# Altium PCB PCB.PcbDoc
Units mm, origin at the board's own origin, x right, y up, seen from the top; angles counter-clockwise.
Board outline 321.18 x 319.79 mm, 2 copper layers (Top Layer, Bottom Layer); 160 components, 123 nets, 699 pads, 0 vias.
Unrouted connection lines stored in the file: 384.
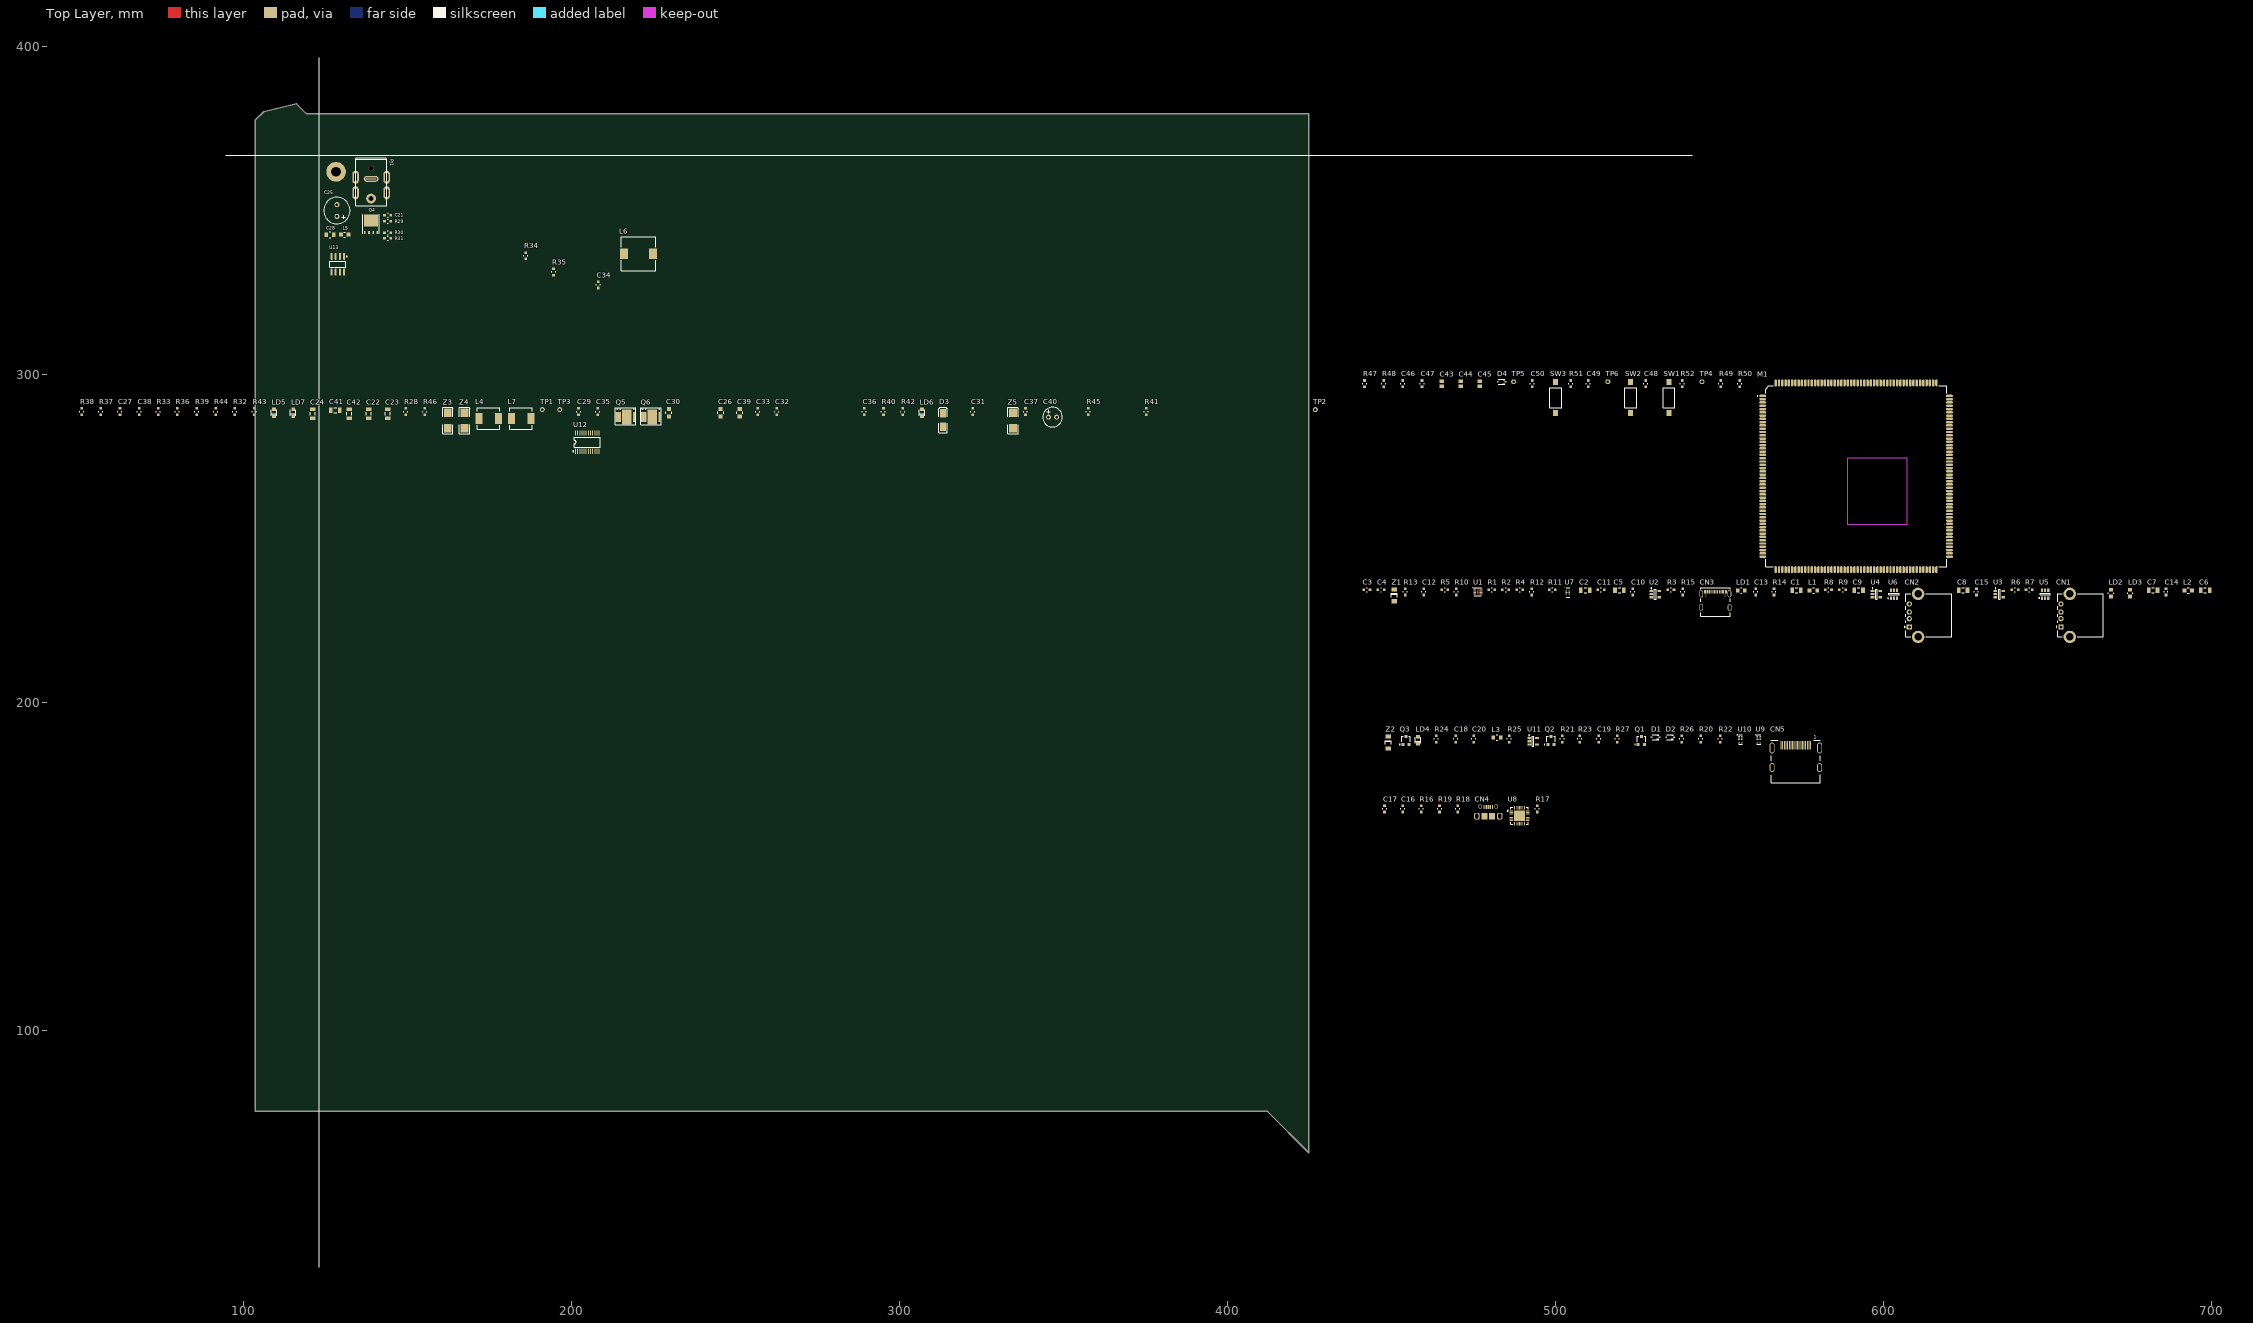
[diagram p0: Top Layer view]
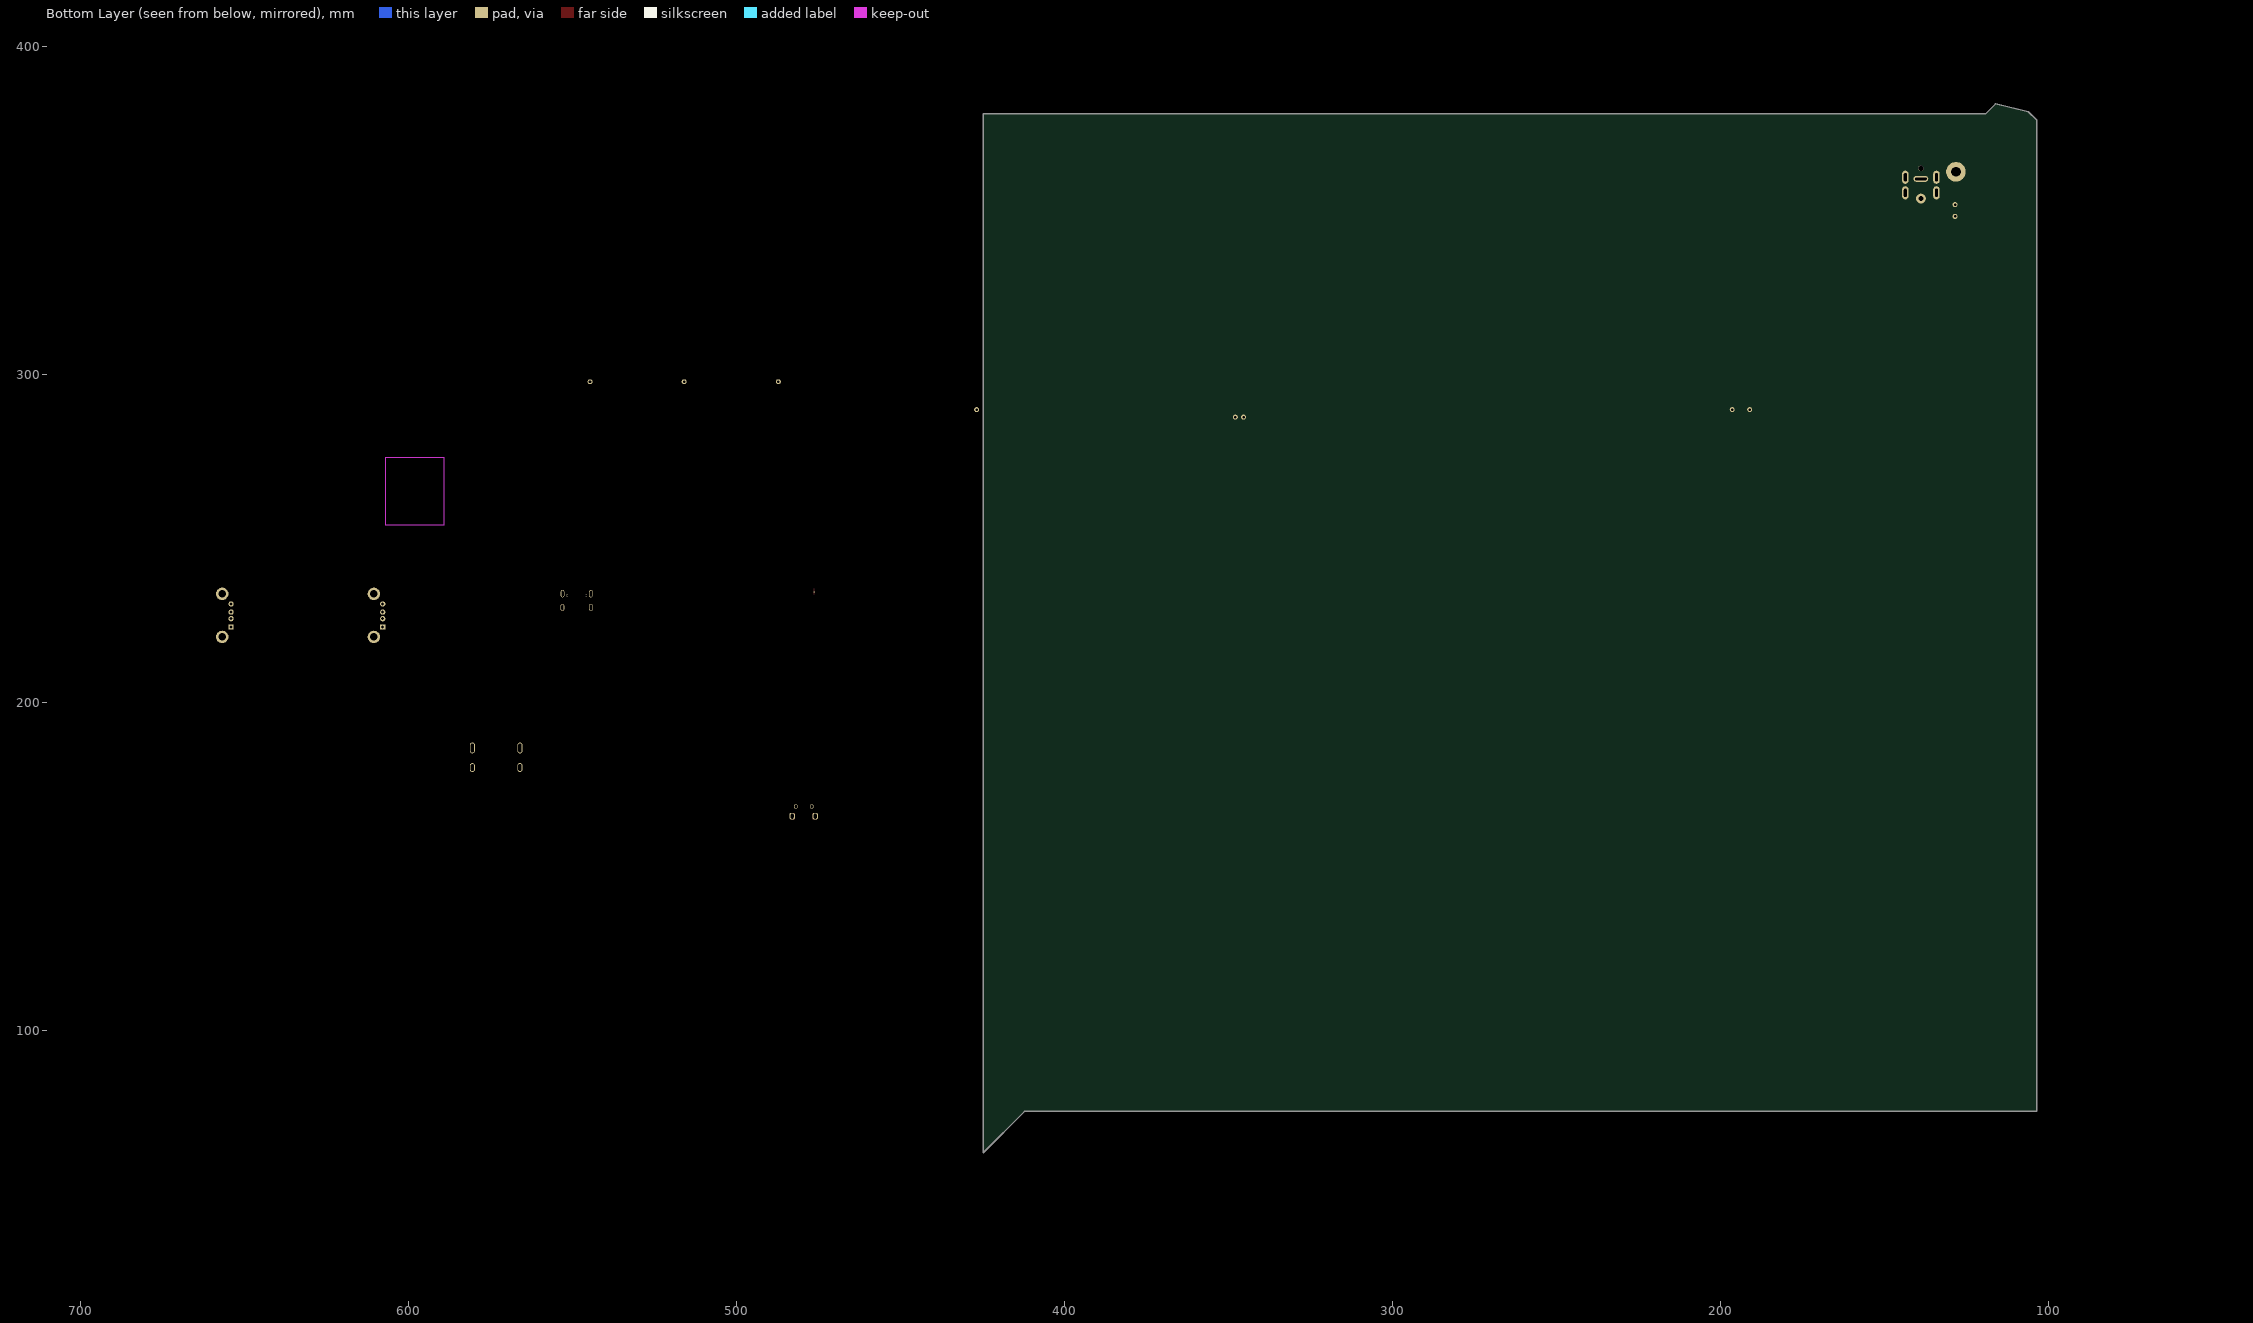
[diagram p1: Bottom Layer view, seen from below]

## Layer stack, top to bottom
Top Solder: solder mask 0.0102, Solder Resist, Dk 3.5
Top Layer: signal copper 0.0356
Dielectric 1: dielectric 0.32, FR-4, Dk 4.8
Bottom Layer: signal copper 0.0356
Bottom Solder: solder mask 0.0102, Solder Resist, Dk 3.5

## Board outline
116.205,382.651 119.253,379.603 424.815,379.603 424.815,62.865 412.242,75.438 103.632,75.438 103.632,377.698 106.172,380.238

## Design rules (kind name [scope] priority, off if disabled: settings)
Clearance [All] p1: gap=0.2 ignorepadtopadclearanceinfootprint=FALSE
DiffPairsRouting [All] p1: maxlimit=0.254 minlimit=0.2 mostfreqgap=0.254 toplayer_minwidth=0.2 toplayer_maxwidth=0.381 toplayer_prefwidth=0.254 bottomlayer_minwidth=0.2 bottomlayer_maxwidth=0.381 bottomlayer_prefwidth=0.254 maxuncoupledlength=12.7
PlaneConnect [All] p1: pad.planeconnectstyle=Relief pad.reliefexpansion=0.508 pad.reliefentries=4 pad.reliefconductorwidth=0.5 pad.reliefairgap=0.4 via.planeconnectstyle=Direct via.reliefexpansion=0.508 via.reliefentries=4 via.reliefconductorwidth=0.254 via.reliefairgap=0.254
PolygonConnect [All] p1: thpad.connectstyle=Relief thpad.reliefconductorwidth=0.5 thpad.reliefentries=4 thpad.polygonreliefangle="90 Angle" thpad.airgapwidth=0.4 smdpad.connectstyle=Relief smdpad.reliefconductorwidth=0.5 smdpad.reliefentries=4 smdpad.polygonreliefangle="90 Angle" smdpad.airgapwidth=0.4 via.connectstyle=Direct via.reliefconductorwidth=0.254 via.reliefentries=4 via.polygonreliefangle="90 Angle" via.airgapwidth=0.254
RoomDefinition x3399 [InComponentClass('x3399')] p1 off: confinementstyle=ConfineIn formatcopy=TRUE lockcomponents=FALSE outline 440.944,239.268 621.538,239.268 621.538,301.498 440.944,301.498
RoomDefinition usb [InComponentClass('usb')] p2 off: confinementstyle=ConfineIn formatcopy=TRUE lockcomponents=FALSE outline 440.944,217.932 700.405,217.932 700.405,237.998 440.944,237.998
RoomDefinition power [InComponentClass('power')] p3 off: confinementstyle=ConfineIn formatcopy=TRUE lockcomponents=FALSE outline 440.944,198.755 829.564,198.755 829.564,216.662 440.944,216.662
RoomDefinition hdmi [InComponentClass('hdmi')] p4 off: confinementstyle=ConfineIn formatcopy=TRUE lockcomponents=FALSE outline 447.736,175.367 581.594,175.367 581.594,193.147 447.736,193.147
RoomDefinition debug [InComponentClass('debug')] p5 off: confinementstyle=ConfineIn formatcopy=TRUE lockcomponents=FALSE outline 447.04,161.925 498.348,161.925 498.348,171.831 447.04,171.831
RoutingVias [All] p1: holewidth=0.711 width=1.27 viastyle="Through Hole" minholewidth=0.711 minwidth=1.27 maxholewidth=0.711 maxwidth=1.27
SolderMaskExpansion [All] p1: expansion=0.102
Width [All] p1: maxlimit=2 minlimit=0.2 preferedwidth=0.3 minimp=50.000000 maximp=50.000000 favimp=50.000000
28 further rules are at their usual default settings.

## Classes and differential pairs
component class debug: C16 C17 CN4 R16 R17 R18 R19 U8
component class hdmi: C18 C19 C20 CN5 D1 D2 L3 LD4 Q1 Q2 Q3 R20 R21 R22 R23 R24 R25 R26 R27 U9 U10 U11 Z2
component class power: C21 C22 C23 C24 C25 C26 C27 C28 C29 C30 C31 C32 C33 C34 C35 C36 C37 C38 C39 C40 C41 C42 D3 L4 L5 L6 L7 LD5 LD6 LD7 PJ1 Q4 Q5 Q6 R28 R29 R30 R31 R32 R33 R34 R35 R36 R37 R38 R39 R40 R41 R42 R43 R44 R45 R46 TP1 TP2 TP3 U12 U13 Z3 Z4 Z5
component class usb: C1 C2 C3 C4 C5 C6 C7 C8 C9 C10 C11 C12 C13 C14 C15 CN1 CN2 CN3 L1 L2 LD1 LD2 LD3 R1 R2 R3 R4 R5 R6 R7 R8 R9 R10 R11 R12 R13 R14 R15 U1 U2 U3 U4 U5 U6 U7 Z1
component class x3399: C43 C44 C45 C46 C47 C48 C49 C50 D4 M1 R47 R48 R49 R50 R51 R52 SW1 SW2 SW3 TP4 TP5 TP6
differential pair HDMI_CLK: +HDMI_CLK_P -HDMI_CLK_N
differential pair HDMI_C: +HDMI_C_P -HDMI_C_N
differential pair HDMI_D0: +HDMI_D0_P -HDMI_D0_N
differential pair HDMI_D1: +HDMI_D1_P -HDMI_D1_N
differential pair HDMI_D2: +HDMI_D2_P -HDMI_D2_N
differential pair HDMI_TX0: +HDMI_TX0_P -HDMI_TX0_N
differential pair HDMI_TX1: +HDMI_TX1_P -HDMI_TX1_N
differential pair HDMI_TX2: +HDMI_TX2_P -HDMI_TX2_N
differential pair TYPEC0_D: +TYPEC0_D_P -TYPEC0_D_N
differential pair TYPEC0_SBU: +TYPEC0_SBU_P -TYPEC0_SBU_N
differential pair TYPEC_AUX: +TYPEC_AUX_P -TYPEC_AUX_N
differential pair USB20_D: +USB20_D_P -USB20_D_N
differential pair USB21_D: +USB21_D_P -USB21_D_N
differential pair USB_D0: +USB_D0_P -USB_D0_N
differential pair USB_D1: +USB_D1_P -USB_D1_N
differential pair USBC_AUX: +USBC_AUX_P -USBC_AUX_N
differential pair USBC_D: +USBC_D_P -USBC_D_N

## Components (designator, comment, footprint, x,y, rotation, side; value= is the part's Value field where it differs from the comment)
C1 "CL31A107MQHNNNE" C1206 573.532,234.315 r0 top value="100uF 6.3v"
C2 "CL31A107MQHNNNE" C1206 509.143,234.315 r0 top value="100uF 6.3v"
C3 "CL10C221JB8NNNC" C0603 441.579,234.569 r0 top value=220pF
C4 "CL10C221JB8NNNC" C0603 445.897,234.569 r0 top value=220pF
C5 "CL31A107MQHNNNE" C1206 519.557,234.315 r0 top value="100uF 6.3v"
C6 "CL31A107MQHNNNE" C1206 698.119,234.315 r0 top value="100uF 6.3v"
C7 "CL31A107MQHNNNE" C1206 682.244,234.315 r0 top value="100uF 6.3v"
C8 "CL31A107MQHNNNE" C1206 624.332,234.315 r0 top value="100uF 6.3v"
C9 "CL31A107MQHNNNE" C1206 592.455,234.315 r0 top value="100uF 6.3v"
C10 "C1608X7R1H104K080AA" C0603 523.621,232.918 r90 top value=0.1uF
C11 "C1608X7R1H104K080AA" C0603 512.953,234.569 r0 top value=0.1uF
C12 "C1608X7R1H104K080AA" C0603 459.867,232.918 r90 top value=0.1uF
C13 "C1608X7R1H104K080AA" C0603 561.086,232.918 r90 top value=0.1uF
C14 "C1608X7R1H104K080AA" C0603 686.181,232.918 r90 top value=0.1uF
C15 "C1608X7R1H104K080AA" C0603 628.396,232.918 r90 top value=0.1uF
C16 "CC0603MRX5R5BB106" C0603 453.517,166.751 r90 top value="10uF 6.3V"
C17 "C1608X7R1H104K080AA" C0603 447.929,166.751 r90 top value=0.1uF
C18 "CC0603MRX5R5BB106" C0603 469.58,188.067 r90 top value="10uF 6.3V"
C19 "CC0603MRX5R5BB106" C0603 513.268,188.067 r90 top value="10uF 6.3V"
C20 "CC0603MRX5R5BB106" C0603 475.168,188.067 r90 top value="10uF 6.3V"
C21 "GRM188R61H105KAALD" C0603 144.907,348.742 r180 top value=1uF
C22 "CL31A107MQHNNNE" C1206 138.176,288.163 r90 top value="100uF 6.3v"
C23 "CL31A107MQHNNNE" C1206 144.018,288.163 r90 top value="100uF 6.3v"
C24 "CL31A107MQHNNNE" C1206 121.158,288.163 r90 top value="100uF 6.3v"
C25 "ECAP 330/25V 0811 105'C" R08H04 128.524,350.139 r90 top value="330uF 25V"
C26 "CL21A226MAQNNNE" C0805#1 245.491,287.528 r90 top value="22uF 25v"
C27 "CL10B472KB8NNNC" C0603 62.357,287.909 r90 top value=4700pF
C28 "CL21A226MAQNNNE" C0805#1 127.381,342.773 r180 top value="22uF 25v"
C29 "C1608X7R1H104K080AA" C0603 202.184,287.909 r90 top value="0.1uF 50V"
C30 "CL21A226MAQNNNE" C0805#1 229.743,287.528 r90 top value="22uF 25v"
C31 "CL10B103KB8NNNC" C0603 322.326,287.909 r90 top value=0.01uF
C32 "GRM188R61H105KAALD" C0603 262.636,287.909 r90 top value="1uF 50V"
C33 "GRM21BR71A475KA73L" C0603 256.794,287.909 r90 top value="4.7uF 10V"
C34 "C1608X7R1H104K080AA" C0603 208.153,326.517 r90 top value=0.1uF
C35 "C1608X7R1H104K080AA" C0603 208.026,287.909 r90 top value="0.1uF 50V"
C36 "CL10C221JB8NNNC" C0603 289.306,287.909 r90 top value=220pF
C37 "CL10C221JB8NNNC" C0603 338.455,287.909 r90 top value=220pF
C38 "CL10B472KB8NNNC" C0603 68.199,287.909 r90 top value=4700pF
C39 "CL21A226MAQNNNE" C0805#1 251.333,287.528 r90 top value="22uF 25v"
C40 "EEEFK1A471P" R06H11 346.71,287.147 r0 top value="470uF 10v"
C41 "CL31A107MQHNNNE" C1206 128.016,289.306 r0 top value="100uF 6.3v"
C42 "CL31A107MQHNNNE" C1206 132.334,288.163 r90 top value="100uF 6.3v"
C43 "CL21A226MQQNNNE" C0805#2 465.328,297.307 r90 top value="22uF 6.3v"
C44 "CL21A226MQQNNNE" C0805#2 471.17,297.307 r90 top value="22uF 6.3v"
C45 "CL21A226MQQNNNE" C0805#2 477.012,297.307 r90 top value="22uF 6.3v"
C46 "GRM188R61H105KAALD" C0603 453.517,296.418 r90 top value="1uF 16V"
C47 "GRM188R61H105KAALD" C0603 459.359,296.418 r90 top value="1uF 16V"
C48 "C1608X7R1H104K080AA" C0603 527.558,296.418 r90 top value=0.1uF
C49 "C1608X7R1H104K080AA" C0603 510.032,296.418 r90 top value=0.1uF
C50 "C1608X7R1H104K080AA" C0603 493.014,296.418 r90 top value=0.1uF
CN1 "USB Type-A Single" USB-A-SINGLE 667.131,226.695 r0 top value=KLS1-181A
CN2 "USB Type-A Single" USB-A-SINGLE 620.903,226.695 r0 top value=KLS1-181A
CN3 "USB Type-C 16 pins" USB-C-16P 548.767,233.299 r0 top value="USB Type-C"
CN4 "USB Type-B mini" USB-B_SMD-MICRO-01 479.552,165.481 r0 top value=KLS1-229-5FD
CN5 "KLS1-285-19-22-N1B" 1747981-1 580.832,186.035 r0 top value=HDMI
D1 "CDSOD323-T12C" SOD-323 530.54,189.591 r0 top value=TVS
D2 "CDSOD323-T12C" SOD-323 534.985,189.591 r0 top value=TVS
D3 "MBRA340" SMA 313.309,286.258 r90 top
D4 "BAT60AE6327HTSA1" SOD-323 483.616,297.942 r0 top value=BAT60
L1 "BLM21PG221SN1D" IND0805 577.723,234.315 r0 top value=EMIF
L2 "BLM21PG221SN1D" IND0805 692.023,234.315 r0 top value=EMIF
L3 "BLM21PG221SN1D" IND0805 481.264,189.464 r0 top value=EMIF
L4 "IHLP2525CZER3R3M01" IHLP-2525CZ 174.752,286.766 r0 top value=3.3uH
L5 "BLM21PG221SN1D" IND0805 131.826,342.773 r180 top value=EMIF
L6 "CDRH104RNP-150NC" CDRH104R 220.472,336.931 r0 top value=15uH
L7 "IHLP2525CZER2R2M01" IHLP-2525CZ 184.658,286.766 r0 top value=2.2uH
LD1 "LED_R" R0805 555.752,234.315 r0 top
LD2 "LED_R" R0805 669.417,232.537 r90 top
LD3 "LED_R" R0805 675.259,232.537 r90 top
LD4 "LED_G" LED0805 458.15,187.686 r90 top
LD5 "LED_G" LED0805 109.347,287.528 r90 top value=5V0
LD6 "LED_G" LED0805 306.959,287.528 r90 top value=STBY
LD7 "LED_G" LED0805 115.189,287.528 r90 top value=3V3
M1 "X3399-CORE" X3399-CORE 591.693,269.113 r0 top
PJ1 "PJ-082BH" PJ-082BH 138.938,359.791 r0 top value="PowerJack 2P"
Q1 "IRLML2402TRPBF" SOT-23-3 526.222,188.575 r0 top value=IRLML2402
Q2 "IRLML2402TRPBF" SOT-23-3 498.663,188.575 r0 top
Q3 "IRLML2402" SOT-23-3 454.467,188.575 r0 top
Q4 "IRFH9310" PQFN_5X6 138.963,345.758 r270 top
Q5 "IRFH7911TR2PBF" PQFN5X6_DUAL 216.281,287.401 r0 top value=IRFH7911
Q6 "IRFH7911TR2PBF" PQFN5X6_DUAL 224.028,287.401 r0 top value=IRFH7911
R1 "100k" R0603 479.679,234.569 r0 top
R2 "100k" R0603 483.87,234.569 r0 top
R3 "4.7k" R0603 534.289,234.569 r0 top
R4 "100k" R0603 488.188,234.569 r0 top
R5 "900k" R0603 465.328,234.569 r0 top
R6 "4.7k" R0603 639.191,234.569 r0 top
R7 "4.7k" R0603 643.509,234.569 r0 top
R8 "10k" R0603 582.295,234.569 r0 top
R9 "10k" R0603 586.613,234.569 r0 top
R10 "10k" R0603 469.773,232.918 r90 top
R11 "100k" R0603 498.094,234.569 r0 top
R12 "100k" R0603 492.76,232.918 r90 top
R13 "15k" R0603 454.279,232.918 r90 top
R14 "2M" R0603 566.674,232.918 r90 top
R15 "2M" R0603 538.861,232.918 r90 top
R16 "10k" R0603 459.105,166.751 r90 top
R17 "100" R0603 494.538,166.751 r90 top
R18 "100" R0603 470.281,166.751 r90 top
R19 "1k 1%" R0603 464.693,166.751 r90 top
R20 "4.7k" R0603 544.383,188.067 r90 top
R21 "4.7k" R0603 502.092,188.067 r90 top
R22 "4.7k" R0603 550.225,188.067 r90 top
R23 "4.7k" R0603 507.426,188.067 r90 top
R24 "1k" R0603 463.738,188.067 r90 top
R25 "4.7k" R0603 485.963,188.067 r90 top
R26 "10k" R0603 538.541,188.067 r90 top
R27 "10k" R0603 518.856,188.067 r90 top
R28 "2k" R0603 149.479,287.909 r90 top
R29 "15k" R0603 144.907,346.837 r180 top value=100k
R30 "47k" R0603 143.002,343.408 r0 top
R31 "15k" R0603 143.002,341.63 r0 top
R32 "33k 1%" R0603 97.409,287.909 r90 top
R33 "6.2k 1%" R0603 74.041,287.909 r90 top
R34 "169k 1%" R0603 186.055,335.407 r90 top
R35 "37.4k 1%" R0603 194.564,330.454 r90 top
R36 "3.4k 1%" R0603 79.883,287.909 r90 top
R37 "100k" R0603 56.515,287.909 r90 top
R38 "10k 1%" R0603 50.673,287.909 r90 top value=10k
R39 "3.92k 1%" R0603 85.725,287.909 r90 top
R40 "30.9k 1%" R0603 295.148,287.909 r90 top
R41 "10.2k 1%" R0603 375.285,287.909 r90 top
R42 "3.24k 1%" R0603 300.99,287.909 r90 top
R43 "32k 1%" R0603 103.251,287.909 r90 top
R44 "10k 1%" R0603 91.567,287.909 r90 top
R45 "1k" R0603 357.632,287.909 r90 top
R46 "1k" R0603 155.321,287.909 r90 top
R47 "1k" R0603 441.833,296.418 r90 top
R48 "1k" R0603 447.675,296.418 r90 top
R49 "1k" R0603 550.418,296.418 r90 top
R50 "1k" R0603 556.26,296.418 r90 top
R51 "1k" R0603 504.698,296.418 r90 top
R52 "10k" R0603 538.734,296.418 r90 top
SW1 "RECOVERY" TACTM-34N-F 534.67,292.989 r90 top value="SW tact 2-pin"
SW2 "RESET" TACTM-34N-F 522.986,292.989 r90 top value="SW tact 2-pin"
SW3 "POWER_KEY" TACTM-34N-F 500.126,292.989 r90 top value="SW tact 2-pin"
TP1 "TEST-POINT" PAD 191.135,289.433 r0 top
TP2 "TEST-POINT" PAD 426.847,289.433 r90 top
TP3 "TEST-POINT" PAD 196.469,289.433 r90 top
TP4 "TEST-POINT" PAD 544.703,297.942 r90 top
TP5 "TEST-POINT" PAD 487.299,297.942 r90 top
TP6 "TEST-POINT" PAD 516.001,297.942 r90 top
U1 "TUSB319-Q1" PWSON-8 476.377,233.934 r0 top
U2 "STMPS2161STR" SOT-23-5 530.479,233.172 r0 top value=STMPS21x1STR
U3 "STMPS2151STR" SOT-23-5 635.381,233.172 r0 top value=STMPS21x1STR
U4 "STMPS2151STR" SOT-23-5 597.916,233.172 r0 top value=STMPS21x1STR
U5 "USBLC6-2" SOT-23-6 649.351,233.172 r0 top
U6 "USBLC6-2" SOT-23-6 603.25,233.172 r0 top
U7 "ESD224DQAR" USON-10 503.809,233.68 r0 top value=ESD224
U8 "CP2102-GMR" RHD28_M 489.077,165.608 r0 top
U9 "ESD224DQAR" USON-10 562.036,188.829 r0 top value=ESD224
U10 "ESD224DQAR" USON-10 556.448,188.829 r0 top value=ESD224
U11 "TLV75730PDBVR" SOT-23-5 493.202,188.321 r0 top value=TLV733P
U12 "TPS53127" TSSOP-24 204.851,279.527 r0 top
U13 "TPS54233DR" D008_N 128.778,333.756 r270 top value=TPS54233
Z1 "BZV55-C3V3.115" SOD-80C 450.85,232.791 r90 top value=3V3
Z2 "BZV55-C3V3.115" SOD-80C 449.006,187.94 r90 top value=3V3
Z3 "SMBJ5.0A-TR" SMB 162.306,286.004 r90 top value=5V0
Z4 "SMBJ3V3-E3/52" SMB 167.386,286.004 r90 top value=3V3
Z5 "SMBJ3V3-E3/52" SMB 334.645,286.004 r90 top value=3V3

## Footprints (in the part's own frame and the unit in brackets; to place one, negate y for a bottom-side part, rotate by r counter-clockwise, add the part's x,y. Pads: shape width x height; smd on the part's side, far side on the other; paste and mask are expansions set on the pad)
1747981-1 [mm] "Standard HDMI, Type A Series, 1 Port"
  rect 0.3x2.6 smd: 1(-3,1) 2(-3.5,1) 3(-4,1) 4(-4.5,1) 5(-5,1) 6(-5.5,1) 7(-6,1) 8(-6.5,1) 9(-7,1) 10(-7.5,1) 11(-8,1) 12(-8.5,1) 13(-9,1) 14(-9.5,1) 15(-10,1) 16(-10.5,1) 17(-11,1) 18(-11.5,1) 19(-12,1)
  oval 1.5x3.3 hole 0.9 slot 2.7 at 90 deg: 20(-0.25,0.24) 23(-14.76,0.24)
  oval 1.5x2.7 hole 0.9 slot 2.1 at 90 deg: 21(-0.26,-5.73) 22(-14.75,-5.71)
  silkscreen extent -15,-10.3 0,2.6, body extent -15,-10.3 0,1.8, height 6.03
C0603 [mm]
  rect 0.8x0.8 smd: 1(1.905,0) 2(0,0)
  silkscreen extent 0.8,-0.6 1.1,0.6, body extent 0.2,-0.4 1.8,0.4, height 0.9
C0805#1 [mm]
  rect 1.14x1.27 smd: 1(2.1,0) 2(-0.2,0)
  silkscreen extent 0.7,-0.9 1.2,0.9, body extent 0,-0.6 2,0.6, height 0.9
C0805#2 [mm] "Chip Capacitor, Body 2.0x1.3mm, IPC High Density"
  rect 1.1x1.4 smd: 1(-0.75,0) 2(0.75,0)
  body extent -1.1,-0.72 1.1,0.72, height 1.4
C1206 [mm] "Chip Capacitor, Body 3.2x1.6mm, IPC High Density"
  rect 1.1x1.7 smd: 1(-1.35,0) 2(1.35,0)
  silkscreen extent -0.4,-0.75 0.4,0.75, body extent -1.7,-0.9 1.7,0.9, height 1.3
CDRH104R [mm] "SMD Power Inductor, 10.5x10.3x4.0mm max"
  rect 2.5x3.2 smd: 1(-4.45,0) 2(4.45,0)
  silkscreen extent -5.25,-5.15 5.25,5.15, body extent -5.28,-5.07 5.28,5.07, height 3.9
D008_N [mm] "8-Pin Small Outline Integrated Circuit 1.27 mm Pitch, IPC Medium Density"
  oval 2.2x0.6 smd: 1(-2.4,1.905) 2(-2.4,0.635) 3(-2.4,-0.635) 4(-2.4,-1.905) 5(2.4,-1.905) 6(2.4,-0.635) 7(2.4,0.635) 8(2.4,1.905)
  silkscreen extent -2.52,-2.5 0.9,2.88, body extent -3,-2.45 3,2.45, height 1.7
IHLP-2525CZ [mm] "Low-Profile, High-Current IHLP® Inductor"
  rect 2.15x3.429 smd: 1(-2.975,0) 2(2.975,0)
  silkscreen extent -3.45,-3.25 3.45,3.25, body extent -3.54,-3.3 3.54,3.37, height 2.89
IND0805 [mm]
  rect 1.14x1.2 smd: 1(2.1,0) 2(-0.2,0)
  silkscreen extent 0.7,-0.8 1.2,0.8, body extent -0.1,-0.6 1.9,0.6, height 0.95
LED0805 [mm]
  rect 1.14x1.2 smd: 1(-0.127,0) 2(2.032,0)
  silkscreen extent 0,-0.83 1.91,0.84, body extent -0.16,-0.46 1.9,0.45, height 0.85
PAD [mm]
  round 1.5 hole 0.8: 1(0,0)
PJ-082BH [mm] "24V 10A"
  round 3 hole 1.5: 1(0,-6)
  oval 4.5x1.8 hole 0.8 slot 3.5 at 0 deg: 2(0,0)
  round 1.6 hole 1.6 unplated: MH(0,3.25)
  oval 2x4 hole 0.8 slot 2.5 at 90 deg: MH1(-4.75,0.5) MH2(4.75,0.5) MH3(4.75,-4.25) MH4(-4.75,-4.25)
  silkscreen extent -4.75,-8.25 4.75,6.5, body extent -5.1,-7 5.1,6.13, height 10.15
PQFN5X6_DUAL [mm]
  rect 1.643x3.15 smd: D1(-1.983,-0.201)
  rect 0.5x0.6 smd: G1(-2.327,2.25) G2(2.732,2.25) NC(-1.408,2.25)
  rect 2.9x4.5 smd: S1/D2(0.663,-0.215)
  rect 0.717x3.15 smd: S2(2.841,-0.201)
  silkscreen extent -2.94,-2.58 3.33,2.68, body extent -2.88,-2.5 3.14,2.5, height 0.9
PQFN_5X6 [mm]
  rect 1x0.5 smd: 1(2.35,1.88) 2(2.35,-0.66) 2(2.35,0.61) 2(2.35,-1.93)
  rect 3.8x4.3 smd: 3(-1.34,-0.03)
  silkscreen extent -3.27,-2.54 2.73,2.46, body extent -3.26,-2.5 2.76,2.5, height 0.9
PWSON-8 [mm]
  oval 0.85x0.28 smd: 1(-0.975,0.75) 2(-0.975,0.25) 3(-0.975,-0.25) 4(-0.975,-0.75) 5(0.975,-0.75) 6(0.975,-0.25) 7(0.975,0.25) 8(0.975,0.75)
  rect 0.5x0.5 hole 0.3: 9(0,0)
  Top Layer region: 0.15,-0.9 0.15,0.9 -0.15,0.9 -0.15,-0.9
  silkscreen extent -1.5,-1.2 1.05,1.25, body extent -1.1,-1.05 1.1,1.05, height 0.8
R06H11 [mil] "Radius 6.3mm, between holes 2.5mm"
  round 60 hole 30: 1(-49.21,0) 2(49.21,0)
  silkscreen extent -118,-118 118,118, body extent -124,-124 124,124, height 434
R08H04 [mil] "Radius 8mm, between holes 4mm"
  round 60 hole 30: 1(-70.87,0) 2(70.87,0)
  silkscreen extent -158,-158 158,158, body extent -157,-157 157,157, height 472
R0603 [mm]
  rect 0.8x0.8 smd: 1(1.905,0) 2(0,0)
  silkscreen extent 0.8,-0.6 1.1,0.6, body extent 0.2,-0.4 1.8,0.4, height 0.5
R0805 [mm]
  rect 1.14x1.2 smd: 1(2,0) 2(-0.1,0)
  silkscreen extent 0.79,-0.8 1.1,0.8, body extent 0,-0.6 2,0.6, height 0.5
RHD28_M [mm] "28-Pin Plastic Quad Flat No-Lead 0.5 mm Pitch, IPC Low Density"
  oval 1.05x0.25 smd: 1(-2.475,1.5) 2(-2.475,1) 3(-2.475,0.5) 4(-2.475,0) 5(-2.475,-0.5) 6(-2.475,-1) 7(-2.475,-1.5) 15(2.475,-1.5) 16(2.475,-1) 17(2.475,-0.5) 18(2.475,0) 19(2.475,0.5) 20(2.475,1) 21(2.475,1.5)
  oval 0.25x1.05 smd: 8(-1.5,-2.475) 9(-1,-2.475) 10(-0.5,-2.475) 11(0,-2.475) 12(0.5,-2.475) 13(1,-2.475) 14(1.5,-2.475) 22(1.5,2.475) 23(1,2.475) 24(0.5,2.475) 25(0,2.475) 26(-0.5,2.475) 27(-1,2.475) 28(-1.5,2.475)
  rect 3.3x3.3 smd: 29(0,0)
  silkscreen extent -3.67,-2.6 2.6,2.6, body extent -2.58,-2.58 2.58,2.58, height 1
SMA [mm]
  rect 2.6x1.8 smd: 1(-2.05,0) 2(2.05,0)
  silkscreen extent -3.8,-1.3 3.95,1.3, body extent -2.5,-1.48 2.5,1.22, height 2.15
SMB [mm]
  rect 2.6x2.4 smd: 1(-2.25,0) 2(2.413,0)
  silkscreen extent -3.9,-1.55 4.1,1.55, body extent -2.65,-1.85 2.65,1.85, height 2.2
SOD-80C [mm]
  rect 1.25x1.7 smd: 1(-1.775,0) 2(1.775,0)
  silkscreen extent -0.6,-1 0.6,0.9, body extent -1.82,-0.8 1.88,0.8, height 1.6
SOD-323 [mm]
  rect 0.59x0.45 smd: 1(-1.175,0) 2(1.175,0)
  silkscreen extent -0.95,-0.75 0.95,0.75, body extent -1.3,-0.68 1.3,0.67, height 1.1
SOT-23-3 [mm]
  rect 0.9x0.95 smd: 1(-0.95,-1.25) 2(0.95,-1.25) 3(0,1.25)
  silkscreen extent -2.07,-1.37 1.3,1.25, body extent -1.52,-1.29 1.48,1.25, height 1.1
SOT-23-5 [mm] "SOT23, 5-Leads, Body 2.9x1.6mm, Pitch 0.95mm, Lead Span 2.8mm, IPC Medium Density"
  rect 1.1x0.65 smd: 1(-1.2,0.95) 2(-1.2,0) 3(-1.2,-0.95) 4(1.2,-0.95) 5(1.2,0.95)
  silkscreen extent -1.32,-1.55 0.25,1.95, body extent -1.44,-1.5 1.4,1.5, height 1.1
SOT-23-6 [mm] "SOT23, 6-Leads, Body 2.9x1.6mm, Pitch 0.95mm, Lead Span 2.8mm, IPC Medium Density"
  rect 0.65x1.1 smd: 1(-0.95,-1.2) 2(0,-1.2) 3(0.95,-1.2) 4(0.95,1.2) 5(0,1.2) 6(-0.95,1.2)
  silkscreen extent -1.95,-1.32 1.55,0.25, body extent -1.55,-1.53 1.55,1.53, height 1.45
TACTM-34N-F [mm]
  rect 1.75x1.524 smd: 1(-4.62,0) 2(4.853,0)
  silkscreen extent -2.95,-1.78 3.17,1.82, body extent -3.88,-1.78 4.13,1.73, height 5.5
TSSOP-24 [mm] "Shrink Small Outline; 24 Leads; Body Width 4.4 mm; Pitch 0.65 mm"
  rect 0.3x1.65 smd: 1(-3.575,-2.775) 2(-2.925,-2.775) 3(-2.275,-2.775) 4(-1.625,-2.775) 5(-0.975,-2.775) 6(-0.325,-2.775) 7(0.325,-2.775) 8(0.975,-2.775) 9(1.625,-2.775) 10(2.275,-2.775) 11(2.925,-2.775) 12(3.575,-2.775) 13(3.575,2.775) 14(2.925,2.775) 15(2.275,2.775) 16(1.625,2.775) 17(0.975,2.775) 18(0.325,2.775) 19(-0.325,2.775) 20(-0.975,2.775) 21(-1.625,2.775) 22(-2.275,2.775) 23(-2.925,2.775) 24(-3.575,2.775)
  silkscreen extent -4.4,-2.9 3.95,1.55, body extent -3.9,-3.2 3.9,3.2, height 1.2
USB-A-SINGLE [mm]
  rect 1.6x1.6 hole 0.92: 1(-12.99,-3.5)
  round 1.6 hole 0.92: 2(-12.99,-1) 3(-12.99,1) 4(-12.99,3.5)
  round 3.8 hole 2.3: 5(-10.28,6.57) 6(-10.28,-6.57)
  silkscreen extent -14.46,-6.57 0,6.57, body extent -13.83,-7.9 -0.13,7.9, height 6.95
USB-B_SMD-MICRO-01 [mm] "ZX62D-B-5PA8"
  rect 1.8x1.9 smd: 0(-1.15,0) 0(1.15,0)
  rect 0.4x1.35 smd: 1(1.3,2.8) 2(0.65,2.8) 3(0,2.8) 4(-0.65,2.8) 5(-1.3,2.8)
  rrect70% 1.05x1.25 hole 0.65 slot 0.85 at 90 deg: 6(-2.425,2.95) 9(2.425,2.95)
  rrect50% 1.6x1.9 hole 0.8 slot 1.5 at 90 deg: 7(-3.512,0) 8(3.512,0)
  Top Layer region: 3.875,0.95 2.6,0.95 2.6,-0.95 3.875,-0.95
  Top Layer region: -3.875,-0.95 -2.6,-0.95 -2.6,0.95 -3.875,0.95
  body extent -4.05,-2.75 4.05,3.05, height 2.75
USB-C-16P [mm] "USB Type-C 16 pin"
  oval 1.1x2.2 hole 0.6 slot 1.7 at 90 deg: 1(-4.32,0) 2(4.32,0) 3(-4.33,-4.17) 4(4.35,-4.18)
  rect 0.3x1.15 smd: A1(-3.33,0.58) A4(-2.54,0.58) A5(-1.25,0.58) A6(-0.25,0.58) A7(0.25,0.58) A8(1.25,0.58) A9(2.55,0.58) A12(3.35,0.58) B1(3.05,0.58) B4(2.25,0.58) B5(1.75,0.58) B6(0.75,0.58) B7(-0.75,0.58) B8(-1.75,0.58) B9(-2.25,0.58) B12(-3.04,0.58)
  round 0.6 hole 0.6 unplated: ""(-2.89,-0.5) ""(2.89,-0.5)
  silkscreen extent -4.49,-6.81 4.52,1.8
USON-10 [mm] "USON, 10-Leads, Body 2,50x1,00mm, Pitch 0,50mm, IPC Medium Density"
  rect 0.5x0.25 smd: 1(-0.43,1) 2(-0.43,0.5) 4(-0.43,-0.5) 5(-0.43,-1) 6(0.43,-1) 7(0.43,-0.5) 9(0.43,0.5) 10(0.43,1)
  rect 0.5x0.35 smd: 3(-0.43,0) 8(0.43,0)
  round 0.25 smd: 3(-0.225,0)
  silkscreen extent -1,-1.45 0.55,1.5, body extent -0.55,-1.3 0.55,1.3, height 0.55
X3399-CORE [mm] "200-Pins, Body 55,00x55,00mmx3,00mm, Pitch 1,00mm"
  oval 2.1x0.75 smd: 1(-28.472,24.5) 2(-28.472,23.5) 3(-28.472,22.5) 4(-28.472,21.5) 5(-28.472,20.5) 6(-28.472,19.5) 7(-28.472,18.5) 8(-28.472,17.5) 9(-28.472,16.5) 10(-28.472,15.5) 11(-28.472,14.5) 12(-28.472,13.5) 13(-28.472,12.5) 14(-28.472,11.5) 15(-28.472,10.5) 16(-28.472,9.5) 17(-28.472,8.5) 18(-28.472,7.5) 19(-28.472,6.5) 20(-28.472,5.5) 21(-28.472,4.5) 22(-28.472,3.5) 23(-28.472,2.5) 24(-28.472,1.5) 25(-28.472,0.5) 26(-28.472,-0.5) 27(-28.472,-1.5) 28(-28.472,-2.5) 29(-28.472,-3.5) 30(-28.472,-4.5) 31(-28.472,-5.5) 32(-28.472,-6.5) 33(-28.472,-7.5) 34(-28.472,-8.5) 35(-28.472,-9.5) 36(-28.472,-10.5) 37(-28.472,-11.5) 38(-28.472,-12.5) 39(-28.472,-13.5) 40(-28.472,-14.5) 41(-28.472,-15.5) 42(-28.472,-16.5) 43(-28.472,-17.5) 44(-28.472,-18.5) 45(-28.472,-19.5) 46(-28.472,-20.5) 47(-28.472,-21.5) 48(-28.472,-22.5) 49(-28.472,-23.5) 50(-28.472,-24.5) 101(28.472,-24.5) 102(28.472,-23.5) 103(28.472,-22.5) 104(28.472,-21.5) 105(28.472,-20.5) 106(28.472,-19.5) 107(28.472,-18.5) 108(28.472,-17.5) 109(28.472,-16.5) 110(28.472,-15.5) 111(28.472,-14.5) 112(28.472,-13.5) 113(28.472,-12.5) 114(28.472,-11.5) 115(28.472,-10.5) 116(28.472,-9.5) 117(28.472,-8.5) 118(28.472,-7.5) 119(28.472,-6.5) 120(28.472,-5.5) 121(28.472,-4.5) 122(28.472,-3.5) 123(28.472,-2.5) 124(28.472,-1.5) 125(28.472,-0.5) 126(28.472,0.5) 127(28.472,1.5) 128(28.472,2.5) 129(28.472,3.5) 130(28.472,4.5) 131(28.472,5.5) 132(28.472,6.5) 133(28.472,7.5) 134(28.472,8.5) 135(28.472,9.5) 136(28.472,10.5) 137(28.472,11.5) 138(28.472,12.5) 139(28.472,13.5) 140(28.472,14.5) 141(28.472,15.5) 142(28.472,16.5) 143(28.472,17.5) 144(28.472,18.5) 145(28.472,19.5) 146(28.472,20.5) 147(28.472,21.5) 148(28.472,22.5) 149(28.472,23.5) 150(28.472,24.5)
  oval 0.75x2.1 smd: 51(-24.5,-28.472) 52(-23.5,-28.472) 53(-22.5,-28.472) 54(-21.5,-28.472) 55(-20.5,-28.472) 56(-19.5,-28.472) 57(-18.5,-28.472) 58(-17.5,-28.472) 59(-16.5,-28.472) 60(-15.5,-28.472) 61(-14.5,-28.472) 62(-13.5,-28.472) 63(-12.5,-28.472) 64(-11.5,-28.472) 65(-10.5,-28.472) 66(-9.5,-28.472) 67(-8.5,-28.472) 68(-7.5,-28.472) 69(-6.5,-28.472) 70(-5.5,-28.472) 71(-4.5,-28.472) 72(-3.5,-28.472) 73(-2.5,-28.472) 74(-1.5,-28.472) 75(-0.5,-28.472) 76(0.5,-28.472) 77(1.5,-28.472) 78(2.5,-28.472) 79(3.5,-28.472) 80(4.5,-28.472) 81(5.5,-28.472) 82(6.5,-28.472) 83(7.5,-28.472) 84(8.5,-28.472) 85(9.5,-28.472) 86(10.5,-28.472) 87(11.5,-28.472) 88(12.5,-28.472) 89(13.5,-28.472) 90(14.5,-28.472) 91(15.5,-28.472) 92(16.5,-28.472) 93(17.5,-28.472) 94(18.5,-28.472) 95(19.5,-28.472) 96(20.5,-28.472) 97(21.5,-28.472) 98(22.5,-28.472) 99(23.5,-28.472) 100(24.5,-28.472) 151(24.5,28.472) 152(23.5,28.472) 153(22.5,28.472) 154(21.5,28.472) 155(20.5,28.472) 156(19.5,28.472) 157(18.5,28.472) 158(17.5,28.472) 159(16.5,28.472) 160(15.5,28.472) 161(14.5,28.472) 162(13.5,28.472) 163(12.5,28.472) 164(11.5,28.472) 165(10.5,28.472) 166(9.5,28.472) 167(8.5,28.472) 168(7.5,28.472) 169(6.5,28.472) 170(5.5,28.472) 171(4.5,28.472) 172(3.5,28.472) 173(2.5,28.472) 174(1.5,28.472) 175(0.5,28.472) 176(-0.5,28.472) 177(-1.5,28.472) 178(-2.5,28.472) 179(-3.5,28.472) 180(-4.5,28.472) 181(-5.5,28.472) 182(-6.5,28.472) 183(-7.5,28.472) 184(-8.5,28.472) 185(-9.5,28.472) 186(-10.5,28.472) 187(-11.5,28.472) 188(-12.5,28.472) 189(-13.5,28.472) 190(-14.5,28.472) 191(-15.5,28.472) 192(-16.5,28.472) 193(-17.5,28.472) 194(-18.5,28.472) 195(-19.5,28.472) 196(-20.5,28.472) 197(-21.5,28.472) 198(-22.5,28.472) 199(-23.5,28.472) 200(-24.5,28.472)
  Keep-Out Layer board cut-out: -2.54,5.588 15.494,5.588 15.494,-14.478 15.494,-14.605 15.494,-14.732 -2.54,-14.732
  silkscreen extent -30.2,-27.6 27.6,27.6, body extent -27.37,-27.75 27.62,27.5, height 0.2

## Part data
C1 C2 C3 C4 C5 C6 C7 C8 C9 C10 C11 C12 C13 C14 C15 C16 C17 C18 C19 C20 C21 C22 C23 C24 C26 C27 C28 C29 C30 C31 C32 C33 C34 C35 C36 C37 C38 C39 C41 C42 C43 C44 C45 C46 C47 C48 C49 C50: library part CAP_NPOL, "CAP_NPOL"
C25 C40: library part CAP_POL, "CAP_POL"
CN1 CN2: library part USB-A-SINGLE
CN3: library part USB-C-16
CN4: library part USB-B-M
CN5: library part HDMI
D1 D2 D3 D4: library part SHOTTKY, "SHOTTKY"
L1 L2 L3 L5: library part IND_WO_IRON, "IND_WO_IRON"
L4 L7: library part IND_W_IRON, "IND_W_IRON"
L6: library part IND_W_IRON
LD1 LD2 LD3: library part LED_RED, "LED Red"
LD4 LD5 LD6 LD7: library part LED_GREEN, "LED Green"
M1: "RK3399 Six-Core 64-bit"
PJ1: library part "PowerJack 2P", "PowerJack 2P"
Q1 Q2 Q3: library part N-Channel, "HEXFET Power MOSFET"
Q4: library part P-Channel, "HEXFET Power MOSFET"
Q5 Q6: library part IRFH7911, "HEXFET Power MOSFET"
R1 R2 R3 R4 R5 R6 R7 R8 R9 R10 R11 R12 R13 R14 R15 R16 R17 R18 R19 R20 R21 R22 R23 R24 R25 R26 R27 R28 R29 R30 R31 R32 R33 R34 R35 R36 R37 R38 R39 R40 R41 R42 R43 R44 R45 R46 R47 R48 R49 R50 R51 R52: library part RESISTOR, "RES"
SW1 SW2 SW3: library part "SW tact 2-pin", "Microswitches, DTSMB-3 series"
TP1 TP2 TP3 TP4 TP5 TP6: "PCB terminal block"
U1: library part TUSB319, "TUSB319-Q1 USB Type-C DFP Port Controller"
U2 U3 U4: library part STMPS21x1STR
U5 U6: "Ultralow capacitance ESD protection"
U7 U9 U10: library part ESD224, "ESD224 Low Clamping 4-Channel ESD Protection Device for HDMI Interface"
U8: library part CP2102, "SINGLE-CHIP USB-TO-UART BRIDGE"
U11: library part TLV733P, "Capacitor-Free, 300-mA, Low-Dropout Regulator with Foldback Current Limit for Portable Devices"
U12: "Dual Synchronous Step-Down Controller  For Low Voltage Power Rails"
U13: library part TPS54232, "TPS54232 2-A, 28-V, 300kHz, Step-Down DC-DC Converter With Eco-Mode™"
Z1 Z2 Z3 Z4 Z5: library part ZENNER_1, "ZENNER"

## Free pads (board coordinates)
  round 6 hole 3: MH(128.27,361.95)

## Nets (pads, with @x,y where several pads share a name; then routed paths per layer and width w, separated by ;. In a path a pad name is that pad's centre, name@x,y a point inside that pad or via, vN(x,y) a via of type N, cw(c..) or ccw(c..) an arc to the next point about the centre after c; other vN are vias at no path point)
1V8_S3: M1.120 R47.1 R48.2 R49.2 R50.1 R52.2 TP5.1
3V3: C41.2 C42.2 C43.1 C44.1 C45.1 L7.2 M1.51 M1.52 R43.1 R46.2 TP3.1 U12.9 Z4.2
5V0: C22.1 C23.1 C24.2 L1.1 L2.1 L3.2 L4.1 R28.2 R32.1 R51.1 TP1.1 U12.4 Z3.2
CORE_DBG_RX_30: M1.44 R18.1 R19.1
CORE_DBG_TX_30: M1.45 R17.1
GND: C1.1 C2.1 C3.2 C4.2 C5.1 C6.1 C7.1 C8.1 C9.1 C12.2 C13.2 C14.2 C15.2 C16.2 C17.2 C18.2 C19.2 C20.2 C21.2 C22.2 C23.2 C24.1 C25.2 C26.1 C27.1 C28.1 C30.1 C31.1 C32.1 C33.2 C36.1 C38.1 C39.1 C40.2 C41.1 C42.1 C43.2 C44.2 C45.2 C46.1 C47.1 C48.2 C49.2 C50.2 CN1.4 CN1.5 CN1.6 CN2.4 CN2.5 CN2.6 CN3.1 CN3.2 CN3.3 CN3.4 CN3.A1 CN3.A12 CN3.B1 CN3.B12 CN4.5 CN4.6 CN4.7 CN4.8 CN4.9 CN5.2 CN5.5 CN5.8 CN5.11 CN5.17 CN5.20 CN5.21 CN5.22 CN5.23 D1.1 D2.1 D3.1 LD5.1 LD6.1 LD7.1 M1.53 M1.84 M1.182 PJ1.2 PJ1.MH1 PJ1.MH2 PJ1.MH3 PJ1.MH4 Q3.2 Q5.S2 Q6.S2 R4.1 R8.2 R9.2 R13.1 R14.1 R15.1 R19.2 R26.1 R27.1 R29.2 R31.2 R33.2 R35.2 R36.2 R37.1 R39.2 R40.2 R42.2 R44.2 SW1.2 SW2.2 SW3.2 U1.6 U1.9 U2.2 U3.2 U4.2 U5.2 U6.2 U7.3 U7.8 U8.3 U8.29 U9.3 U9.8 U10.3 U10.8 U11.2 U12.6 U12.15 U12.22 U13.7 Z1.1 Z2.1 Z3.1 Z4.1 Z5.1
HDMI_3V0: C20.1 Q1.1 Q2.1 R20.2 R21.2 R24.2 U11.5
HDMI_5V0: C18.1 C19.1 CN5.18 L3.1 R22.2 R23.2 U11.1 U11.3
HDMI_C_N: CN5.12 U10.1
HDMI_C_P: CN5.10 U10.2
HDMI_CLK_N: M1.85 U10.10
HDMI_CLK_P: M1.86 U10.9
HDMI_D0_N: CN5.9 U10.4
HDMI_D0_P: CN5.7 U10.5
HDMI_D1_N: CN5.6 U9.1
HDMI_D1_P: CN5.4 U9.2
HDMI_D2_N: CN5.3 U9.4
HDMI_D2_P: CN5.1 U9.5
HDMI_HPD_18: M1.49 Q3.1 R25.1 Z2.2
HDMI_HPD_50: CN5.19 R25.2 R26.2
HDMI_SCL_30: M1.47 Q1.2 R20.1
HDMI_SCL_50: CN5.15 D1.2 Q1.3 R22.1
HDMI_SDA_30: M1.46 Q2.2 R21.1
HDMI_SDA_50: CN5.16 D2.2 Q2.3 R23.1
HDMI_TX0_N: M1.87 U10.7
HDMI_TX0_P: M1.88 U10.6
HDMI_TX1_N: M1.89 U9.10
HDMI_TX1_P: M1.90 U9.9
HDMI_TX2_N: M1.91 U9.7
HDMI_TX2_P: M1.92 U9.6
I2C1_SCL_18: M1.7 R47.2
I2C1_SDA_18: M1.6 R48.1
I2C4_SCL_18: M1.150 R49.1
I2C4_SDA_18: M1.151 R50.2
NetC16_1: C16.1 CN4.1 U8.7 U8.8
NetC17_1: C17.1 R16.1 U8.6
NetC21_1: C21.1 PJ1.1 Q4.3 R29.1
NetC27_2: C27.2 U12.7
NetC28_2: C28.2 L5.1 R34.1 U13.2
NetC29_1: C29.1 U12.2
NetC29_2: C29.2 Q5.G1 U12.1
NetC31_2: C31.2 U13.4
NetC32_2: C32.2 U12.18
NetC33_1: C33.1 U12.19
NetC34_1: C34.1 D3.2 L6.1 U13.8
NetC34_2: C34.2 U13.1
NetC35_1: C35.1 Q6.G1 U12.12
NetC35_2: C35.2 U12.11
NetC36_2: C36.2 C37.1 U13.6
NetC37_2: C37.2 R40.1
NetC38_2: C38.2 U12.17
NetCN4_2: CN4.2 U8.5
NetCN4_3: CN4.3 U8.4
NetCN5_13: CN5.13 R27.2
NetL4_2: L4.2 Q5.S1/D2 U12.24
NetL7_1: L7.1 Q6.S1/D2 U12.13
NetLD1_1: LD1.1 R3.2
NetLD2_1: LD2.1 R6.1
NetLD3_1: LD3.1 R7.2
NetLD4_1: LD4.1 Q3.3
NetLD4_2: LD4.2 R24.1
NetLD5_2: LD5.2 R28.1
NetLD6_2: LD6.2 R45.1
NetLD7_2: LD7.2 R46.1
NetM1_50: M1.50 R51.2 TP6.1
NetM1_152: M1.152 TP4.1
NetQ4_1: Q4.1 R30.1 R31.1
NetQ5_G2: Q5.G2 U12.23
NetQ6_G2: Q6.G2 U12.14
NetR1_1: R1.1 U1.4
NetR2_1: R2.1 U1.5 U2.4
NetR3_1: R3.1 U2.3
NetR4_2: R4.2 U1.2
NetR5_1: R5.1 U1.3
NetR6_2: R6.2 U4.3
NetR7_1: R7.1 U3.3
NetR16_2: R16.2 U8.9
NetR17_2: R17.2 U8.25
NetR18_2: R18.2 U8.26
NetR32_2: R32.2 R33.1 U12.5
NetR34_2: R34.2 R35.1 U13.3
NetR36_1: R36.1 U12.21
NetR37_2: R37.2 R38.2 U12.3 U12.10
NetR39_1: R39.1 U12.16
NetR41_2: R41.2 R42.1 U13.5
NetR43_2: R43.2 R44.1 U12.8
PMU_RESET#: C49.1 M1.29 SW2.1
POWER_EN: M1.34 R38.1
POWER_KEY#: C50.1 M1.121 SW3.1
RECOVERY_KEY#: C48.1 M1.112 R52.1 SW1.1
RTC_VCC: C47.2 D4.2 M1.37
STBY_3V3: C40.1 C46.2 D4.1 L6.2 M1.42 R41.1 R45.2 TP2.1 Z5.2
TYPEC0_5V0: C1.2 L1.2 LD1.2 R1.2 R2.2 U1.7 U2.5
TYPEC0_D_N: M1.105 U7.7
TYPEC0_D_P: M1.106 U7.6
TYPEC0_SBU1_DC: M1.93 R11.2
TYPEC0_SBU2_DC: M1.94 R12.2
TYPEC0_SBU_N: C11.2 M1.95
TYPEC0_SBU_P: C10.2 M1.96
TYPEC0_U2VBUSDET: C12.1 M1.111 R10.2 R13.2 Z1.2
TYPEC0_VBUS: C2.2 C5.2 C13.1 CN3.A4 CN3.A9 CN3.B4 CN3.B9 R5.2 R10.1 U2.1
TYPEC_AUX_N: C11.1 R12.1 R14.2 U7.9
TYPEC_AUX_P: C10.1 R11.1 R15.2 U7.10
TYPEC_CC1: C4.1 CN3.A5 U1.8
TYPEC_CC2: C3.1 CN3.B5 U1.1
USB20_D_N: M1.116 U5.6
USB20_D_P: M1.117 U5.4
USB20_PWEN_30: M1.31 R8.1 U3.4
USB21_D_N: M1.118 U6.6
USB21_D_P: M1.119 U6.4
USB21_PWEN_30: M1.32 R9.1 U4.4
USB_5V0: C6.2 C7.2 L2.2 LD2.2 LD3.2 U3.5 U4.5
USB_D0_N: CN1.2 U5.1
USB_D0_P: CN1.3 U5.3
USB_D1_N: CN2.2 U6.1
USB_D1_P: CN2.3 U6.3
USB_VBUS0: C8.2 C14.1 CN1.1 U3.1 U5.5
USB_VBUS1: C9.2 C15.1 CN2.1 U4.1 U6.5
USBC_AUX_N: CN3.B8 U7.2
USBC_AUX_P: CN3.A8 U7.1
USBC_D_N: CN3.A7 CN3.B7 U7.4
USBC_D_P: CN3.A6 CN3.B6 U7.5
VIN: C25.1 C26.2 C30.2 C39.2 L5.2 Q4.2 Q5.D1 Q6.D1 R30.2 U12.20
pads on no net: CN3. CN4.0 CN4.4 CN5.14 M1.1 M1.2 M1.3 M1.4 M1.5 M1.8 M1.9 M1.10 M1.11 M1.12 M1.13 M1.14 M1.15 M1.16 M1.17 M1.18 M1.19 M1.20 M1.21 M1.22 M1.23 M1.24 M1.25 M1.26 M1.27 M1.28 M1.30 M1.33 M1.35 M1.36 M1.38 M1.39 M1.40 M1.41 M1.43 M1.48 M1.54 M1.55 M1.56 M1.57 M1.58 M1.59 M1.60 M1.61 M1.62 M1.63 M1.64 M1.65 M1.66 M1.67 M1.68 M1.69 M1.70 M1.71 M1.72 M1.73 M1.74 M1.75 M1.76 M1.77 M1.78 M1.79 M1.80 M1.81 M1.82 M1.83 M1.97 M1.98 M1.99 M1.100 M1.101 M1.102 M1.103 M1.104 M1.107 M1.108 M1.109 M1.110 M1.113 M1.114 M1.115 M1.122 M1.123 M1.124 M1.125 M1.126 M1.127 M1.128 M1.129 M1.130 M1.131 M1.132 M1.133 M1.134 M1.135 M1.136 M1.137 M1.138 M1.139 M1.140 M1.141 M1.142 M1.143 M1.144 M1.145 M1.146 M1.147 M1.148 M1.149 M1.153 M1.154 M1.155 M1.156 M1.157 M1.158 M1.159 M1.160 M1.161 M1.162 M1.163 M1.164 M1.165 M1.166 M1.167 M1.168 M1.169 M1.170 M1.171 M1.172 M1.173 M1.174 M1.175 M1.176 M1.177 M1.178 M1.179 M1.180 M1.181 M1.183 M1.184 M1.185 M1.186 M1.187 M1.188 M1.189 M1.190 M1.191 M1.192 M1.193 M1.194 M1.195 M1.196 M1.197 M1.198 M1.199 M1.200 PJ1.MH Q5.NC Q6.NC U8.1 U8.2 U8.10 U8.11 U8.12 U8.13 U8.14 U8.15 U8.16 U8.17 U8.18 U8.19 U8.20 U8.21 U8.22 U8.23 U8.24 U8.27 U8.28 U11.4

## Silkscreen, mask and mechanical layers (free items; w line width, h text height)
Top Overlay:
  lines w0.254: 94.615,367.03 541.782,367.03 ; 123.19,27.94 123.19,396.748

## Text inside footprints (layer, text, board x,y; h text height)
CN5: Top Overlay "1" at 578.832,189.135 h1